# EAGLE board pwm-ppm (EAGLE 6.6.0)
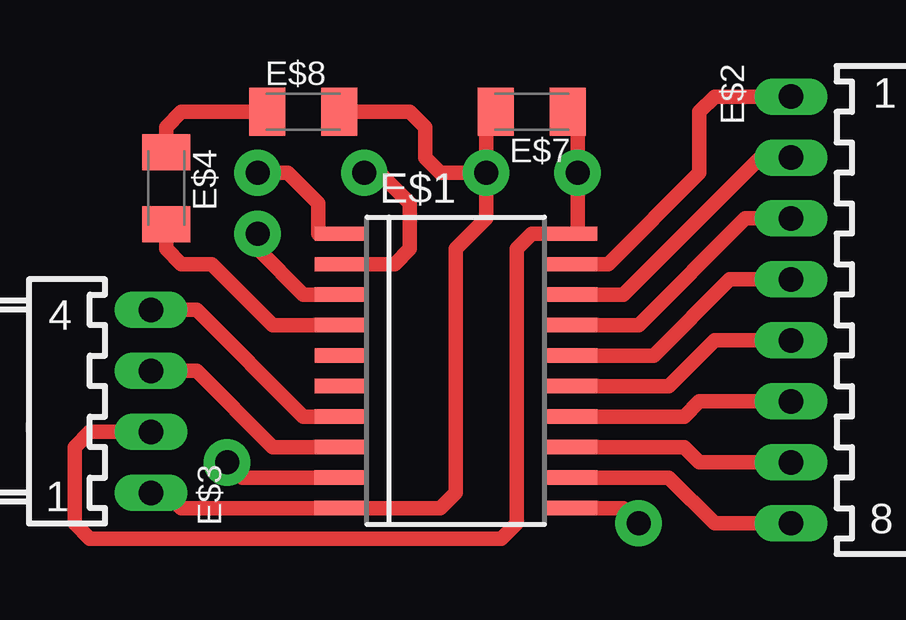
[diagram p0: board, top side]

No outline drawn. Coordinates in mm, seen from the top.
Copper layers (1*16): Top 0.035mm / dielectric 1.5mm / Bottom 0.035mm
Design rules "default": minimum track width 10mil, minimum drill 24mil, track to track 8mil, track to pad 8mil, pad to pad 8mil, via to via 8mil, smd to smd 8mil, copper to edge 40mil, drill to drill 8mil, minimum pad ring 10mil, minimum via ring 8mil, stop-mask expansion 4mil, vias tented up to drill 0mil, thermal gap 10mil

## Footprints (pad centres in the part's own frame; a part is rotated, then mirrored left to right if it is on the bottom)
SOIC20R = smd 0.6 x 2.2: 1 -5.715,-4.775; 2 -4.445,-4.775; 3 -3.175,-4.775; 4 -1.905,-4.775; 5 -0.635,-4.775; 6 0.635,-4.775; 7 1.905,-4.775; 8 3.175,-4.775; 9 4.445,-4.8; 10 5.715,-4.8; 11 5.715,4.8; 12 4.445,4.8; 13 3.175,4.8; 14 1.905,4.8; 15 0.635,4.8; 16 -0.635,4.8; 17 -1.905,4.8; 18 -3.175,4.8; 19 -4.445,4.8; 20 -5.715,4.8
7395-08 = drill 1.016 long: 1 8.89,0; 2 6.35,0; 3 3.81,0; 4 1.27,0; 5 -1.27,0; 6 -3.81,0; 7 -6.35,0; 8 -8.89,0
7395-04 = drill 1.016 long: 1 3.81,0; 2 1.27,0; 3 -1.27,0; 4 -3.81,0
C1206K = smd 1.5 x 2: 1 -1.5,0; 2 1.5,0

## Placement (x,y rotation side)
E$1  [SOIC20R]  17.78,11.43 270 top
E$2  [7395-08]  31.75,13.97 90 top
E$3  [7395-04]  5.08,10.16 270 top
E$4  [C1206K]  5.71,19.05 270 top
E$7  [C1206K]  20.95,22.23 180 top
E$8  [C1206K]  11.43,22.23 0 top

## Library data of the parts
E$1 = analog-devices
E$2 E$3 = con-molex
E$4 E$7 E$8 = resistor

## Nets
S$1: E$2.1
S$2: E$2.2
S$3: E$2.3
S$4: E$2.4
S$5: E$2.5
S$6: E$2.6
S$7: E$2.7
S$8: E$2.8
S$9: E$3.2
S$10: E$3.1
S$16: E$3.3
S$17: E$3.4

## Tracks (layer width: path | path; a pad name or v marks a point on that pad's centre or on a via)
S$1
  Top 0.61: 22.86,15.88 24.13,15.88 27.94,19.68 27.94,22.23 28.57,22.86 E$2.1
S$2
  Top 0.61: 22.86,14.61 24.77,14.61 30.48,20.32 E$2.2
S$3
  Top 0.61: 22.86,13.34 25.4,13.34 29.84,17.78 E$2.3
S$4
  Top 0.61: 22.86,12.06 26.04,12.06 29.21,15.24 E$2.4
S$5
  Top 0.61: 22.86,10.79 26.67,10.79 28.57,12.7 E$2.5
S$6
  Top 0.61: 22.86,9.53 27.3,9.53 27.94,10.16 E$2.6
S$7
  Top 0.61: 22.86,8.26 27.3,8.26 27.94,7.62 E$2.7
S$8
  Top 0.61: 22.23,6.99 26.67,6.99 28.57,5.08 E$2.8
S$9  (via drill 1 pad 1.93)
  Top 0.61: E$3.2 2.54,8.89 1.91,8.26 1.91,5.08 2.54,4.45 19.68,4.45 20.32,5.08 20.32,16.51 20.95,17.14 22.86,17.14 v22.86,19.68 22.86,21.59 22.23,22.23
S$10  (via drill 1 pad 1.93)
  Top 0.61: v19.05,19.68 19.05,17.78 17.78,16.51 17.78,6.35 17.14,5.71 6.35,5.71 5.71,6.35 E$3.1 | v19.05,19.68 19.05,21.59 19.68,22.23 | v19.05,19.68 17.14,19.68 16.51,20.32 16.51,21.59 15.88,22.23 12.7,22.23
S$11
  Top 0.61: 5.71,17.78 5.71,16.51 6.35,15.88 7.62,15.88 10.16,13.34 13.34,13.34
S$12
  Top 0.61: 5.71,20.32 5.71,21.59 6.35,22.23 10.16,22.23
S$13  (via drill 1 pad 1.93)
  Top 0.61: v9.53,19.68 10.79,19.68 12.06,18.41 12.06,17.14
S$14  (via drill 1 pad 1.93)
  Top 0.61: 12.7,15.88 15.24,15.88 15.88,16.51 15.88,18.41 14.61,19.68 v13.97,19.68
S$15  (via drill 1 pad 1.93)
  Top 0.61: 22.23,5.71 24.77,5.71 v25.4,5.08
S$16
  Top 0.61: 12.06,8.26 10.16,8.26 6.99,11.43 E$3.3
S$17
  Top 0.61: 13.34,9.53 11.43,9.53 6.99,13.97 E$3.4
S$18  (via drill 1 pad 1.93)
  Top 0.61: 13.34,6.99 8.89,6.99 v8.26,7.62
S$19  (via drill 1 pad 1.93)
  Top 0.61: 13.34,14.61 11.43,14.61 9.53,16.51 v9.53,17.14